# Altium PCB Alles.PcbDoc (part 2 of 2)
Units mm, origin at the board's own origin, x right, y up, seen from the top; angles counter-clockwise.
Board outline 50 x 25 mm, 4 copper layers (Top Layer, Layer 1, Layer 2, Bottom Layer), stack 1.171 mm thick; 72 components, 42 nets, 250 pads, 140 vias.
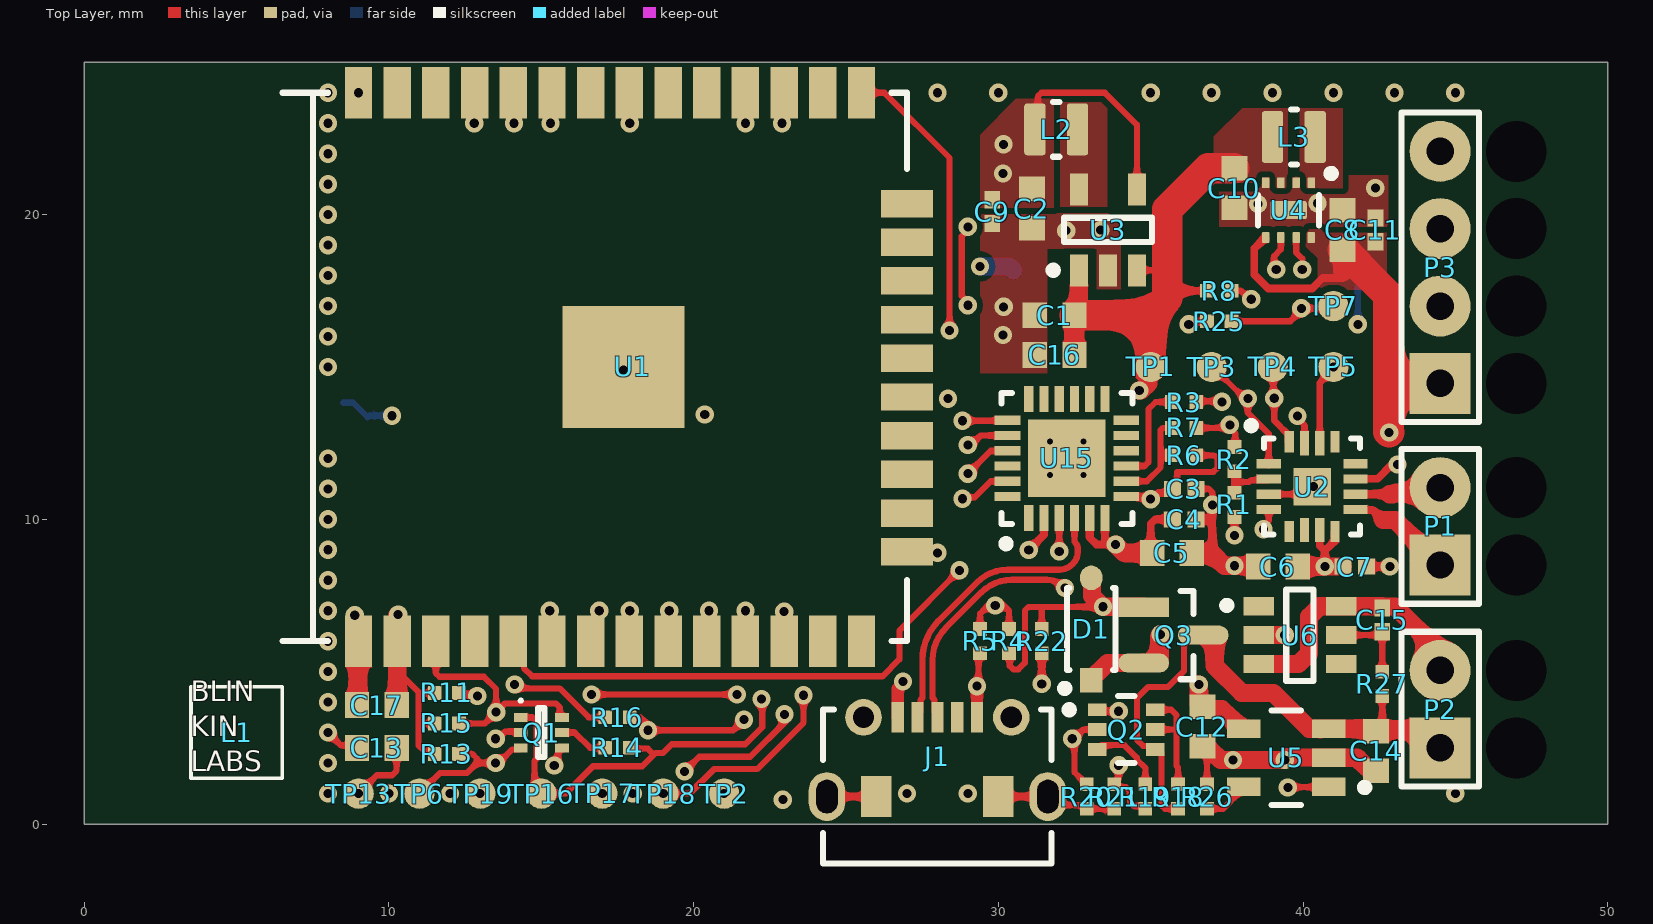
[diagram p0: Top Layer view]

## Silkscreen, mask and mechanical layers (free items; w line width, h text height) (continued)
Dimensions: (continued)
  lines w0.2: -2.899,-31.9 3.9,-31.9 19.362,-31.9 29.327,-31.9 40.124,-31.9 49.588,-31.9 ; -2.899,-29.9 3.9,-29.9 19.362,-29.9 29.327,-29.9 40.124,-29.9 49.588,-29.9 ; -2.899,-27.9 3.9,-27.9 19.362,-27.9 29.327,-27.9 40.124,-27.9 49.588,-27.9 ; -2.899,-25.9 3.9,-25.9 19.362,-25.9 29.327,-25.9 40.124,-25.9 49.588,-25.9 ; -2.899,-23.9 3.9,-23.9 19.362,-23.9 29.327,-23.9 40.124,-23.9 49.588,-23.9 ; -2.899,-21.9 3.9,-21.9 19.362,-21.9 29.327,-21.9 40.124,-21.9 49.588,-21.9 ; -2.899,-19.9 3.9,-19.9 19.362,-19.9 29.327,-19.9 40.124,-19.9 49.588,-19.9 ; -2.899,-17.9 3.9,-17.9 19.362,-17.9 29.327,-17.9 40.124,-17.9 49.588,-17.9 ; -2.899,-15.9 3.9,-15.9 19.362,-15.9 29.327,-15.9 40.124,-15.9 49.588,-15.9 ; -2.899,-13.9 3.9,-13.9 19.362,-13.9 29.327,-13.9 40.124,-13.9 49.588,-13.9 ; -2.899,-11.9 49.588,-11.9 ; 3.9,-9.9 3.9,-33.9 ; 19.362,-9.9 19.362,-33.9 ; 29.327,-9.9 29.327,-33.9 ; 40.124,-9.9 40.124,-33.9 ; 3.9,-33.9 -2.899,-33.9 -2.899,-9.9 49.588,-9.9 49.588,-33.9 40.124,-33.9 ; 3.9,-33.9 19.362,-33.9 ; 19.362,-33.9 29.327,-33.9 ; 29.327,-33.9 40.124,-33.9
  text "Layer" at -1.749,-11.4 h1
  text "Name" at 5.05,-11.4 h1
  text "Material" at 20.512,-11.4 h1
  text "Thickness" at 30.477,-11.4 h1
  text "Constant" at 41.274,-11.4 h1
  text "Top Overlay" at 5.05,-13.4 h1
  text "Top Solder" at 5.05,-15.4 h1
  text "SM-001" at 20.512,-15.4 h1
  text "0.013mm" at 30.477,-15.4 h1
  text "4" at 41.274,-15.4 h1
  text "1" at -1.749,-17.4 h1
  text "Top Layer" at 5.05,-17.4 h1
  text "Copper" at 20.512,-17.4 h1
  text "0.035mm" at 30.477,-17.4 h1
  text "Dielectric 2" at 5.05,-19.4 h1
  text "PP-022" at 20.512,-19.4 h1
  text "0.200mm" at 30.477,-19.4 h1
  text "4.6" at 41.274,-19.4 h1
  text "2" at -1.749,-21.4 h1
  text "Layer 1" at 5.05,-21.4 h1
  text "Copper" at 20.512,-21.4 h1
  text "0.018mm" at 30.477,-21.4 h1
  text "Dielectric 3" at 5.05,-23.4 h1
  text "Core-039" at 20.512,-23.4 h1
  text "0.665mm" at 30.477,-23.4 h1
  text "4.8" at 41.274,-23.4 h1
  text "3" at -1.749,-25.4 h1
  text "Layer 2" at 5.05,-25.4 h1
  text "Copper" at 20.512,-25.4 h1
  text "0.018mm" at 30.477,-25.4 h1
  text "Dielectric 4" at 5.05,-27.4 h1
  text "PP-022" at 20.512,-27.4 h1
  text "0.200mm" at 30.477,-27.4 h1
  text "4.6" at 41.274,-27.4 h1
  text "4" at -1.749,-29.4 h1
  text "Bottom Layer" at 5.05,-29.4 h1
  text "Copper" at 20.512,-29.4 h1
  text "0.035mm" at 30.477,-29.4 h1
  text "Bottom Solder" at 5.05,-31.4 h1
  text "SM-001" at 20.512,-31.4 h1
  text "0.013mm" at 30.477,-31.4 h1
  text "4" at 41.274,-31.4 h1
  text "Bottom Overlay" at 5.05,-33.4 h1
  text "Total board thickness:" at -1.749,-35.4 h1
  text "1.197mm" at 30.477,-35.4 h1

## Dimensions
0,0 to 0,25 on Dimensions
0,0 to 50,0 on Dimensions

## Text inside footprints (layer, text, board x,y; h text height)
L1: Top Overlay "BLIN / KIN / LABS" at 3.5,1.5 h1.15